# Altium PCB PCB1.PcbDoc
Units mm, origin at the board's own origin, x right, y up, seen from the top; angles counter-clockwise.
Board outline 30 x 30 mm, 2 copper layers (Top Layer, Bottom Layer); 15 components, 14 nets, 34 pads, 5 vias.
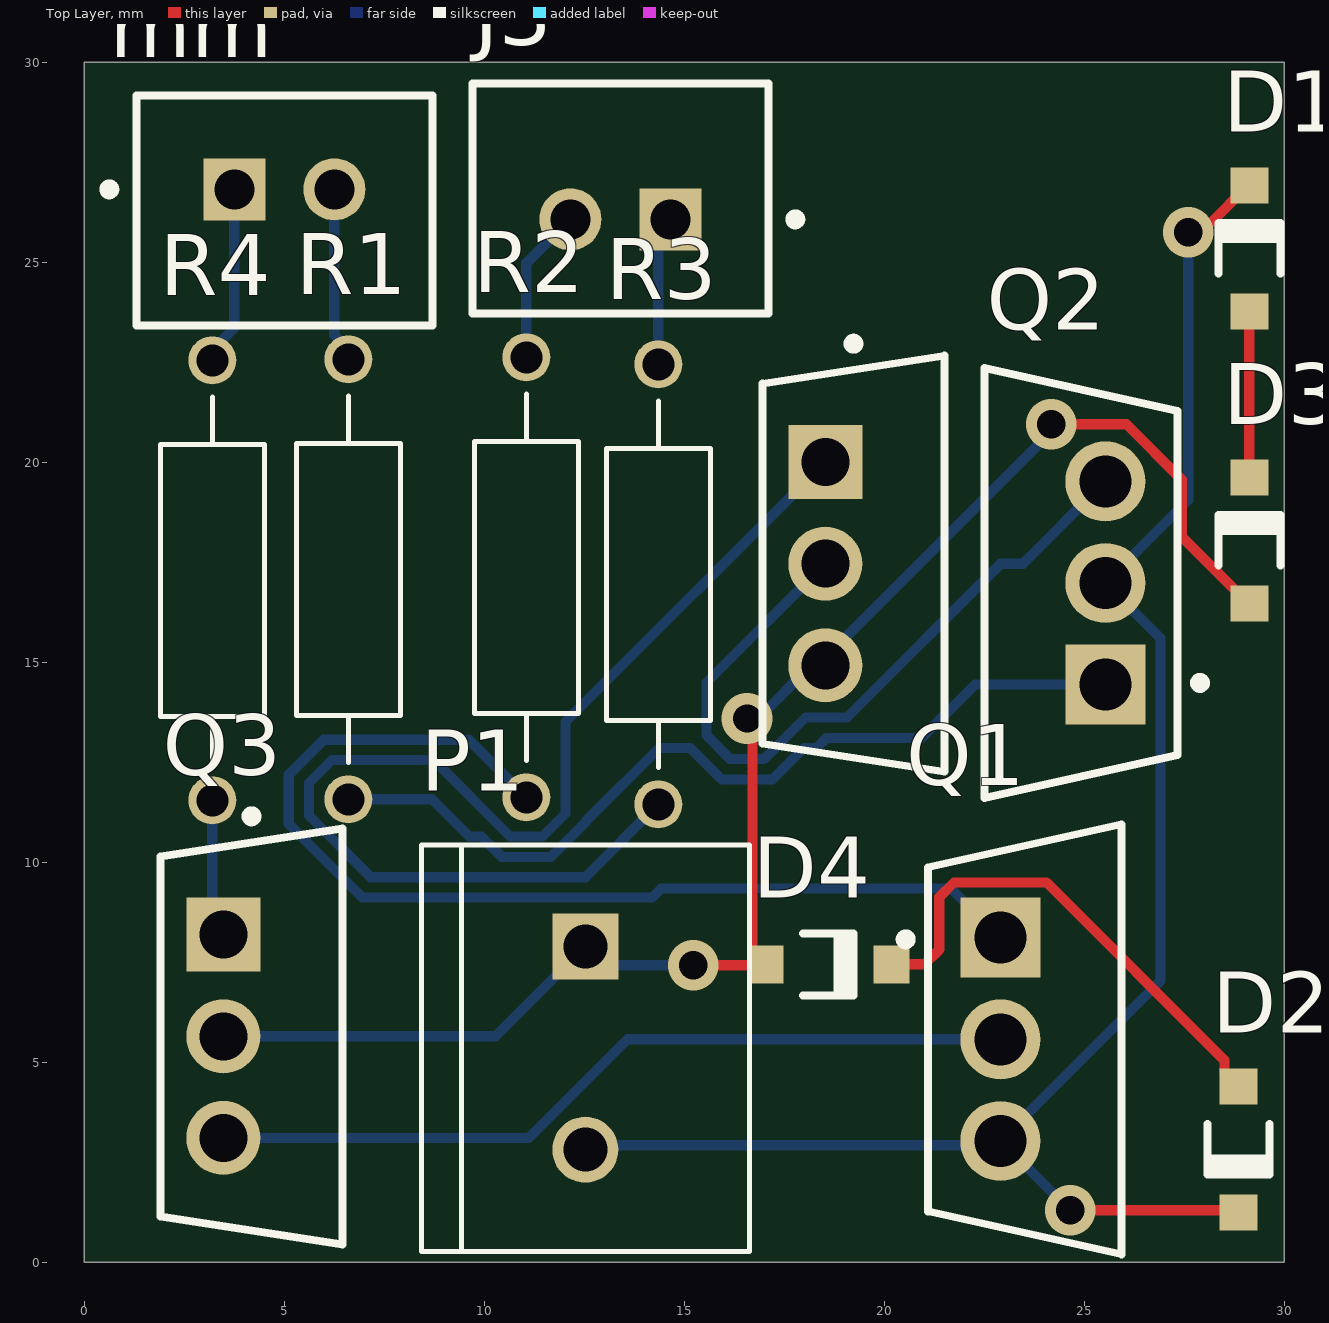
[diagram p0: Top Layer view]
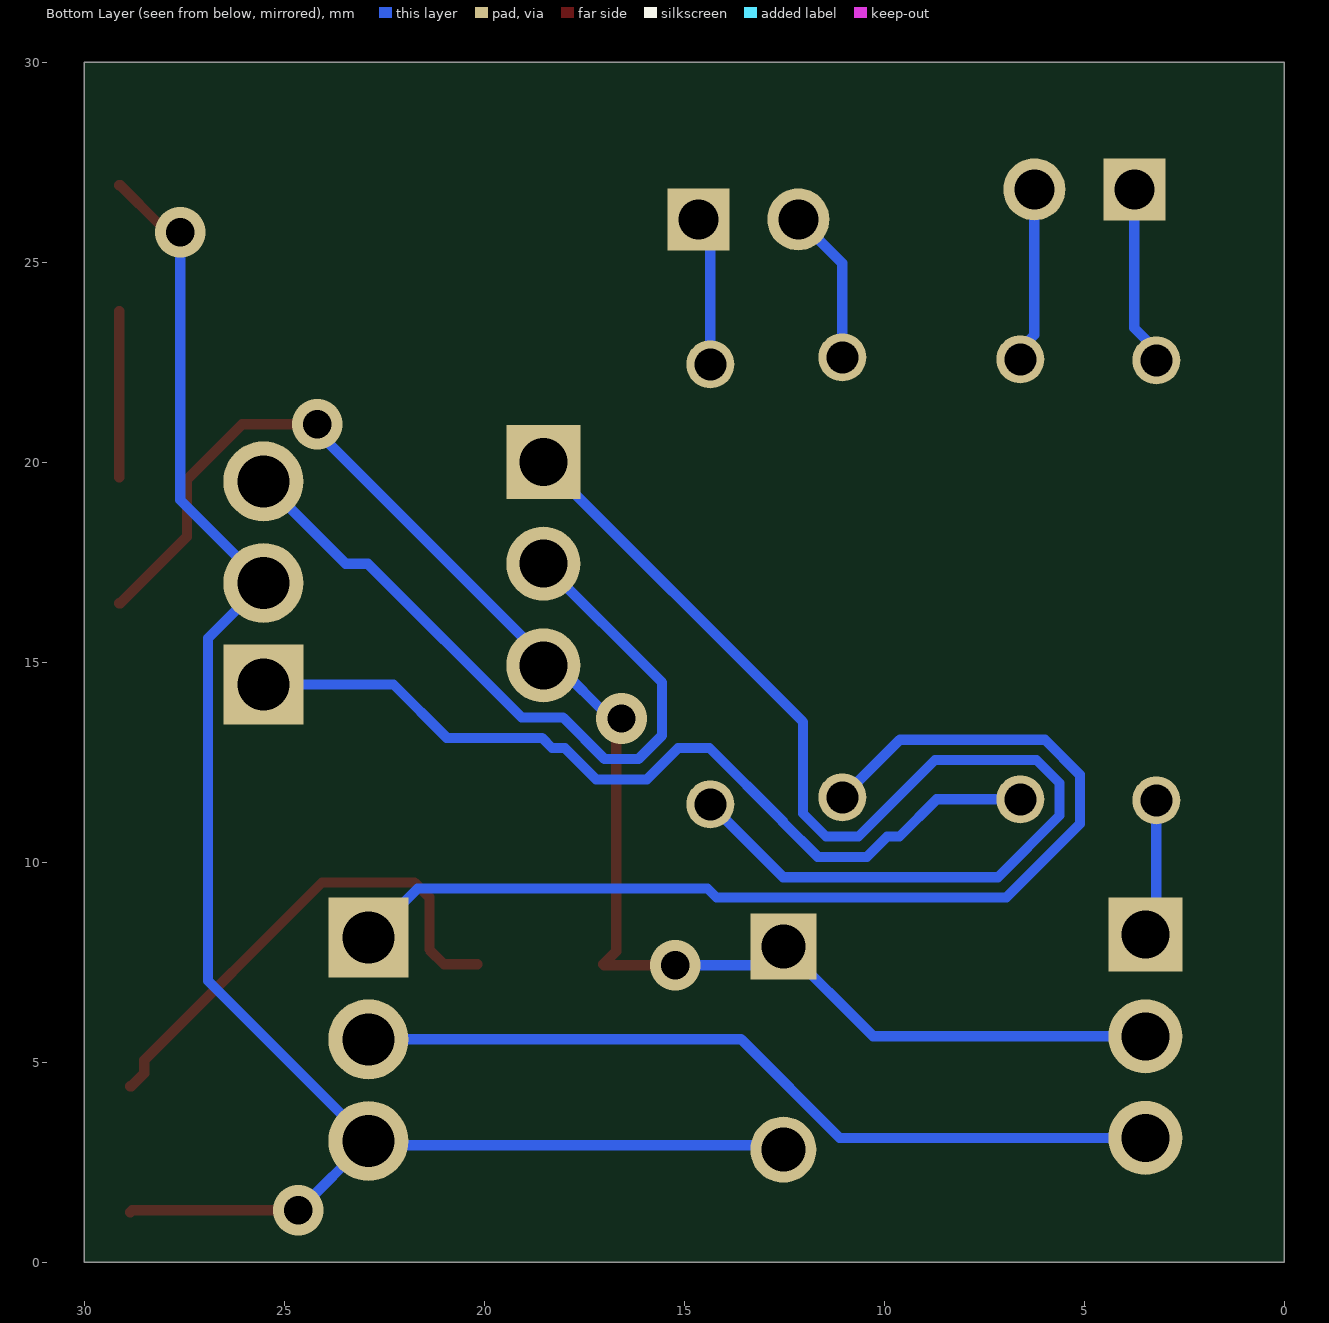
[diagram p1: Bottom Layer view, seen from below]
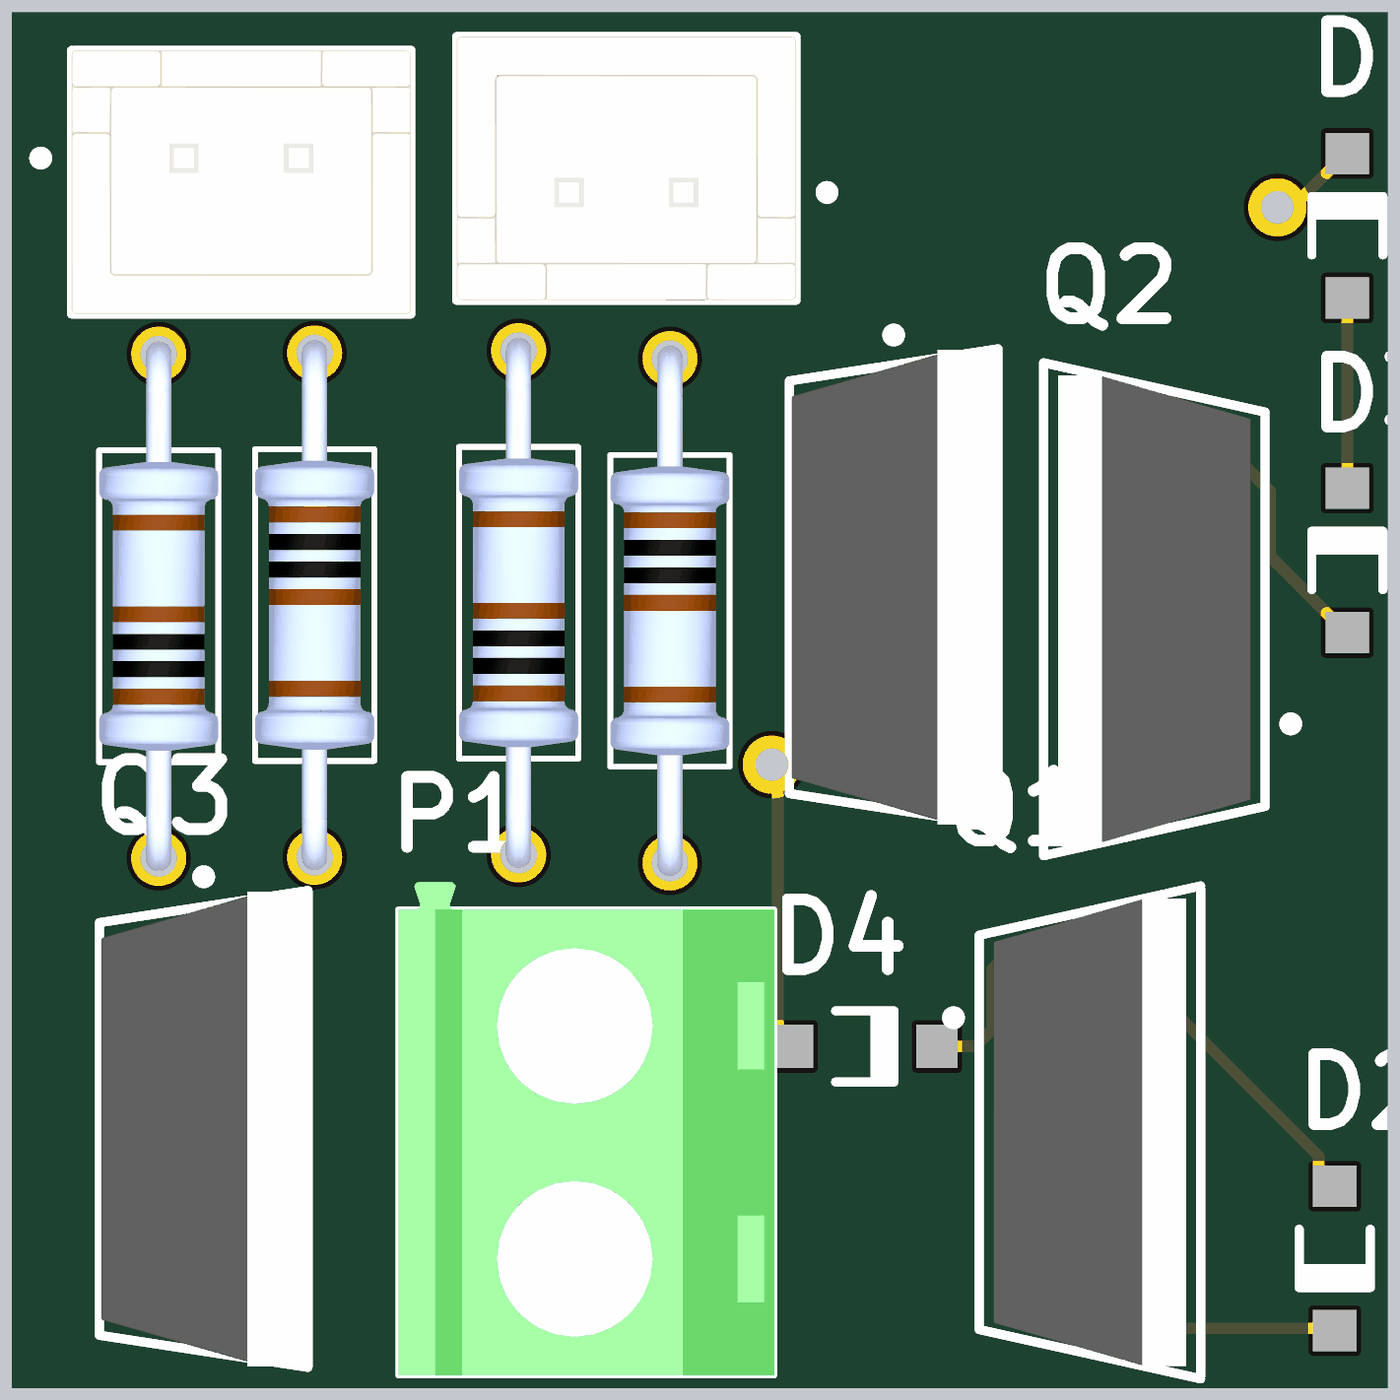
[diagram p2: 3D render of the assembled board from above, using the file's embedded part models]

## Layer stack, top to bottom
Top Solder: solder mask 0.0102, Solder Resist, Dk 3.5
Top Layer: signal copper 0.0356
Dielectric 1: dielectric 0.32, FR-4, Dk 4.8
Bottom Layer: signal copper 0.0356
Bottom Solder: solder mask 0.0102, Solder Resist, Dk 3.5

## Board outline
0,0 30,0 30,30 0,30

## Design rules (kind name [scope] priority, off if disabled: settings)
Clearance [All] p1: gap=0.254 ignorepadtopadclearanceinfootprint=FALSE
PolygonConnect [All] p1: connectstyle=Relief reliefconductorwidth=0.254 reliefentries=4 polygonreliefangle="90 Angle" airgapwidth=0.254
RoutingVias [All] p1: holewidth=0.711 width=1.27 viastyle="Through Hole" minholewidth=0.711 minwidth=1.27 maxholewidth=0.711 maxwidth=1.27
SolderMaskExpansion [All] p1: expansion=0.102 istentingtop=FALSE
SupplyNets "Schematic Supply Nets_1" [InNet('+12')] p1: voltage=0.000
SupplyNets "Schematic Supply Nets" [InNet('GND')] p2: voltage=0.000
Width [All] p1: maxlimit=0.254 minlimit=0.254 preferedwidth=0.254
30 further rules are at their usual default settings.

## Components (designator, comment, footprint, x,y, rotation, side; value= is the part's Value field where it differs from the comment)
D1 "1N4148W-7-F" DIOD-SOD123-2_V 29.125,25.35 r90 top
D2 "1N4148W-7-F" DIOD-SOD123-2_V 28.85,2.825 r270 top
D3 "1N4148W-7-F" DIOD-SOD123-2_V 29.125,18.05 r90 top
D4 "1N4148W-7-F" DIOD-SOD123-2_V 18.6,7.45 r0 top
J3 "B2B-XH-A(LF)(SN)" FP-B2B-XH-A_LF_SN-MFG 13.4,26.6 r180 top
mm "B2B-XH-A(LF)(SN)" FP-B2B-XH-A_LF_SN-MFG 5,26.3 r0 top (schematic designator J2)
P1 "282837-2" TE_282837-2 12.525,5.355 r270 top
Q1 "IRF4905PBF" FP-PG-TO220-3-MFG#1 23.51,5.575 r0 top
Q2 "IRF4905PBF" FP-PG-TO220-3-MFG#1 24.915,16.985 r180 top
Q3 "IRLZ44NPbF" FP-PG-TO220-3-MFG#2 4.18,5.65 r0 top
R1 "MFR-25FBF52-330" RESAD1100W55L680D260 6.6,17.075 r270 top
R2 "MFR-25FBF52-330" RESAD1100W55L680D260 11.05,17.125 r90 top
R3 "MFR-25FBF52-330" RESAD1100W55L680D260 14.35,16.95 r270 top
R4 "MFR-25FBF52-330" RESAD1100W55L680D260 3.2,17.05 r90 top
? "IRLZ44NPbF" FP-PG-TO220-3-MFG#2 19.23,17.465 r0 top

## Footprints (in the part's own frame and the unit in brackets; to place one, negate y for a bottom-side part, rotate by r counter-clockwise, add the part's x,y. Pads: shape width x height; smd on the part's side, far side on the other; paste and mask are expansions set on the pad)
DIOD-SOD123-2_V [mm] "SOD123, 2-Leads, Body 2.7x1.55mm, Height 1.45mm"
  rect 0.9x0.95 smd: 1(-1.575,0) 2(1.575,0)
  silkscreen extent -0.64,-0.83 0.64,0.77, body extent -1.35,-0.77 1.35,0.77, height 1.45
FP-B2B-XH-A_LF_SN-MFG [mm]
  rect 1.55x1.55 hole 1 paste-2539.97 mask+0: 1(-1.25,0.525)
  round 1.55 hole 1 paste-2539.97 mask+0: 2(1.25,0.525)
  silkscreen extent -4.5,-2.88 3.7,2.88, body extent -3.8,-2.98 3.8,2.98, height 0.25
FP-PG-TO220-3-MFG#1 [mm]
  rect 2x2 hole 1.3 paste-2539.97 mask+0: 1(-0.61,2.54)
  round 2 hole 1.3 paste-2539.97 mask+0: 2(-0.61,0) 3(-0.61,-2.54)
  silkscreen extent -3.1,-5.38 2.41,5.38, body extent -2.51,-5.48 2.51,5.48, height 0.25
FP-PG-TO220-3-MFG#2 [mm]
  rect 1.85x1.85 hole 1.2 paste-2539.97 mask+0: 1(-0.705,2.54)
  round 1.85 hole 1.2 paste-2539.97 mask+0: 2(-0.705,0) 3(-0.705,-2.54)
  silkscreen extent -2.27,-5.2 2.27,5.62, body extent -2.37,-5.55 2.37,5.55, height 0.25
RESAD1100W55L680D260 [mm]
  round 1.2 hole 0.8: 1(-5.5,0) 2(5.5,0)
  silkscreen extent -4.58,-1.3 4.58,1.3, body extent -5.77,-1.3 5.77,1.3, height 2.6
TE_282837-2 [mm]
  rect 1.65x1.65 / inner round 1.65 / far side rect 1.65x1.65 hole 1.1: 1(-2.54,0)
  round 1.65 hole 1.1: 2(2.54,0)
  silkscreen extent -5.08,-4.1 5.08,4.1, body extent -5.68,-4.1 5.08,4.1, height 10

## Part data
D1 D2 D3 D4: library part CMP-2000-04932-2, "Fast Switching Diode, 100 V, 0.15 A, -65 to 150 degC, 2-Pin?SOD123, RoHS, Tape and Reel", If - Forward Current=0.15A, Ir - Reverse Current=1uA, Manufacturer=DiodesIncorporated, Max Surge Current=2A, Maximum Operating Temperature=+150C, Minimum Operating Temperature=-65C, Operating Temperature Range=-65Cto+150C, Package / Case=SOD-123, Package Reference=SOD123-2, Peak Reverse Voltage=100V, Vf - Forward Voltage=1.25V, Brand=DiodesIncorporated, Configuration=Single, Datasheet URL=http://www.farnell.com/datasheets/1915529.pdf, Datasheet Version="Rev. 24-2, 10/2013", Factory Pack Quantity=3000, Height=1.25mm, Length=2.85mm, Manufacturer URL=http://www.diodes.com/, Mounting Style=SMD/SMT, Package URL=http://www.diodes.com/datasheets/ds18004.pdf, Packaging=Reel, Product=SwitchingDiodes, Product Category=Diodes-GeneralPurpose,Power,Switching, Recovery Time=4ns, RoHS=True, Series=1N4148, Type=SwitchingDiode, Unit Weight=0.000353oz, Width=1.7mm
J3 mm: library part CMP-2000-05888-3, "CONN HEADER VERT 2POS 2.5MM", Color=Natural, Contact Resistance=20mR, Current Rating=3A, Housing Color=White, Insulation Resistance=1GR, Max Operating Temperature=85°C, Max Voltage Rating (AC)=250V, Min Operating Temperature=-25°C, Connector Type="Male Pin", Contact Material=Brass, Contact Plating=Tin, Contact Type="Male Pin", Depth=5.75mm, Fastening Type=Detent, Housing Material=Polyamide, Lead Free="Lead Free", Lead Pitch=2.5mm, Length=7.4mm, Max Current Rating=3A, Max Voltage Rating (DC)=250V, Mount="Through Hole", Number of Contacts=2, Number of Positions=2, Number of Rows=1, Orientation=Straight, Packaging=Bulk, Pitch=2.5mm, REACH SVHC="No SVHC", Series=XH, Termination=Solder, Voltage Rating=250V, Voltage Rating (AC)=250V, Wire/Cable Gauge=22AWG
P1: "Ð Ð°Ð·ÑŠÐµÐ¼Ð½Ñ‹Ðµ ÐºÐ»ÐµÐ¼Ð¼Ð½Ñ‹Ðµ ÐºÐ¾Ð»Ð¾Ð´ÐºÐ¸ Ð Ð¾Ð·ÐµÑ‚ÐºÐ° 2 Ð¿Ð¾Ð»Ð¾Ð¶ÐµÐ½Ð¸Ñ 5,08 Ð¼Ð¼ ÐŸÑ€Ð¸Ð¿Ð¾Ð¹ Ð¿Ñ€ÑÐ¼Ð¾Ð¹ Ñ‡ÐµÑ€ÐµÐ· Ð¾Ñ‚Ð²ÐµÑ€ÑÑ‚Ð¸Ðµ 13,5 Ð / ÐºÐ¾Ð½Ñ‚Ð°ÐºÑ‚", Package=None, Availability="In Stock", Check_prices=https://www.snapeda.com/parts/282837-2/TE+Connectivity+AMP+Connectors/view-part/?ref=eda, MF="TE Connectivity", MP=282837-2, Price=None, Purchase-URL=https://pricing.snapeda.com/search/part/282837-2/?ref=eda, SnapEDA_Link=https://www.snapeda.com/parts/282837-2/TE+Connectivity+AMP+Connectors/view-part/?ref=snap
Q1 Q2: library part CMP-32901-000200-1, "MOSFET P-CH 55V 74A TO-220AB", Case/Package=TO-220, Continuous Drain Current (ID)=74A, Drain to Source Breakdown Voltage=-55V, Drain to Source Resistance=20mR, Gate to Source Voltage (Vgs)=20V, Input Capacitance=3.4nF, Max Operating Temperature=175°C, Max Power Dissipation=200W, Min Operating Temperature=-55°C, Threshold Voltage=-4V, Drain to Source Voltage (Vdss)=-55V, Element Configuration=Single, Halogen Free="Halogen Free", Height=0.6inch, Lead Free="Lead Free", Length=0.414inch, Max Dual Supply Voltage=-55V, Mount="Through Hole", Number of Pins=3, Packaging=Rail/Tube, Power Dissipation=200W, Rds On Max=20mR, REACH SVHC="No SVHC", RoHS Compliant=Yes, Turn-Off Delay Time=61ns, Turn-On Delay Time=18ns, Width=0.185inch
Q3 ?: library part CMP-32901-000488-1, "MOSFET N-CH 55V 47A TO220AB", Case/Package=TO-220, Continuous Drain Current (ID)=47A, Drain to Source Breakdown Voltage=55V, Drain to Source Resistance=35mR, Gate to Source Voltage (Vgs)=16V, Input Capacitance=1.7nF, Max Operating Temperature=175°C, Max Power Dissipation=110W, Min Operating Temperature=-55°C, Threshold Voltage=2V, Drain to Source Voltage (Vdss)=55V, Element Configuration=Single, Halogen Free="Halogen Free", Height=0.6inch, Lead Free="Lead Free", Length=0.414inch, Max Dual Supply Voltage=55V, Mount="Through Hole", Number of Pins=3, Packaging=Rail/Tube, Power Dissipation=110W, Rds On Max=22mR, REACH SVHC="No SVHC", RoHS Compliant=Yes, Turn-Off Delay Time=26ns, Turn-On Delay Time=11ns, Width=0.185inch
R1 R2 R3 R4: library part MFR-25FBF52-10K, "10.2 kOhms Â±1% 0.25W, 1/4W Through Hole Resistor Axial - Metal Film", Package="Axial Yageo", Availability="In Stock", Check_prices=https://www.snapeda.com/parts/MFR-25FBF52-10K/Yageo/view-part/?ref=eda, MF=Yageo, MP=MFR-25FBF52-10K, Price=None, Purchase-URL=https://pricing.snapeda.com/search/part/MFR-25FBF52-10K/?ref=eda, SnapEDA_Link=https://www.snapeda.com/parts/MFR-25FBF52-10K/Yageo/view-part/?ref=snap

## Via types
v1: diameter 1.27, hole 0.711, Top Layer to Bottom Layer, 5 vias

## Nets (pads, with @x,y where several pads share a name; then routed paths per layer and width w, separated by ;. In a path a pad name is that pad's centre, name@x,y a point inside that pad or via, vN(x,y) a via of type N, cw(c..) or ccw(c..) an arc to the next point about the centre after c; other vN are vias at no path point)
+12: D1.2 D2.2 P1.2 Q1.3 Q2.2 | length 44.9
  Top Layer w0.254: v1(24.65,1.3) 28.8,1.3 D2.2 ; v1(27.6,25.75) 27.794,25.944 28.119,25.944 29.1,26.925 D1.2
  Bottom Layer w0.254: P1.2 12.635,2.925 Q1.3@22.9,2.925 ; v1(24.65,1.3) 24.643,1.3 22.908,3.035 Q1.3 26.906,7.041 26.906,15.604 Q2.2 27.6,19.06 v1(27.6,25.75)
GND: ?.3 D3.1 D4.1 P1.1 Q3.2 | length 39.5
  Top Layer w0.254: v1(15.225,7.425) 17,7.425 D4.1 16.702,7.773 16.702,13.464 v1(16.571,13.596) ; v1(24.175,20.95) 26.053,20.95 27.437,19.566 27.437,18.138 29.1,16.475 D3.1
  Bottom Layer w0.254: Q3.2 10.28,5.65 P1.1 12.995,7.425 v1(15.225,7.425) ; v1(16.571,13.596) 16.846,13.596 18.175,14.925 ?.3 18.525,15.112 24.175,20.763 v1(24.175,20.95)
"MUC1 GND": J3.2 R2.2 | length 3.9
  Bottom Layer w0.254: R2.2 11.05,24.975 J3.2
"MUC1 SIGNAL": J3.1 R3.1 | length 3.7
  Bottom Layer w0.254: R3.1 14.35,25.775 J3.1
"MUC2 GND": mm.2 R1.1 | length 4.4
  Bottom Layer w0.254: mm.2 6.25,23.181 6.6,22.831 R1.1
"MUC2 SIGNAL": mm.1 R4.2 | length 4.5
  Bottom Layer w0.254: R4.2 3.2,22.806 3.75,23.356 mm.1
"Net _1": ?.1 R3.2 | length 30.1
  Bottom Layer w0.254: R3.2 12.528,9.628 7.16,9.628 5.619,11.169 5.619,11.981 6.194,12.556 8.732,12.556 10.644,10.644 11.456,10.644 12.031,11.219 12.031,13.511 ?.1
"Net _2": ?.2 Q2.3 | length 18.6
  Bottom Layer w0.254: ?.2 15.555,14.495 15.555,13.175 16.15,12.58 16.991,12.58 18.031,13.619 19.066,13.619 22.912,17.465 23.465,17.465 Q2.3
NetD1_1: D1.1 D3.2 | length 4.2
  Top Layer w0.254: D3.2 D1.1
NetD2_1: D2.1 D4.2 | length 12.6
  Top Layer w0.254: D4.2 21.006,7.45 21.374,7.818 21.374,9.128 21.742,9.496 24.058,9.496 28.502,5.052 28.502,4.723 28.825,4.4 D2.1
NetM1_1: Q1.2 Q3.3 | length 20.9
  Bottom Layer w0.254: Q3.3 11.114,3.11 13.579,5.575 Q1.2@23.325,5.575
NetQ1_1: Q1.1 R2.1 | length 27.3
  Bottom Layer w0.254: R2.1 9.611,13.064 5.983,13.064 5.111,12.192 5.111,10.958 6.949,9.12 14.195,9.12 14.422,9.347 21.668,9.347 Q1.1
NetQ2_1: Q2.1 R1.2 | length 22
  Bottom Layer w0.254: R1.2 8.691,11.575 9.622,10.644 9.925,10.644 10.433,10.136 11.667,10.136 12.539,11.008 12.539,11.026 14.372,12.859 15.152,12.859 15.939,12.072 17.202,12.072 17.989,12.859 18.306,12.859 18.558,13.111 20.938,13.111 22.272,14.445 Q2.1
NetQ3_1: Q3.1 R4.1 | length 3.5
  Bottom Layer w0.254: R4.1 3.2,8.465 Q3.1